# EAGLE board MLT22V1.91 (EAGLE 7.2.0)
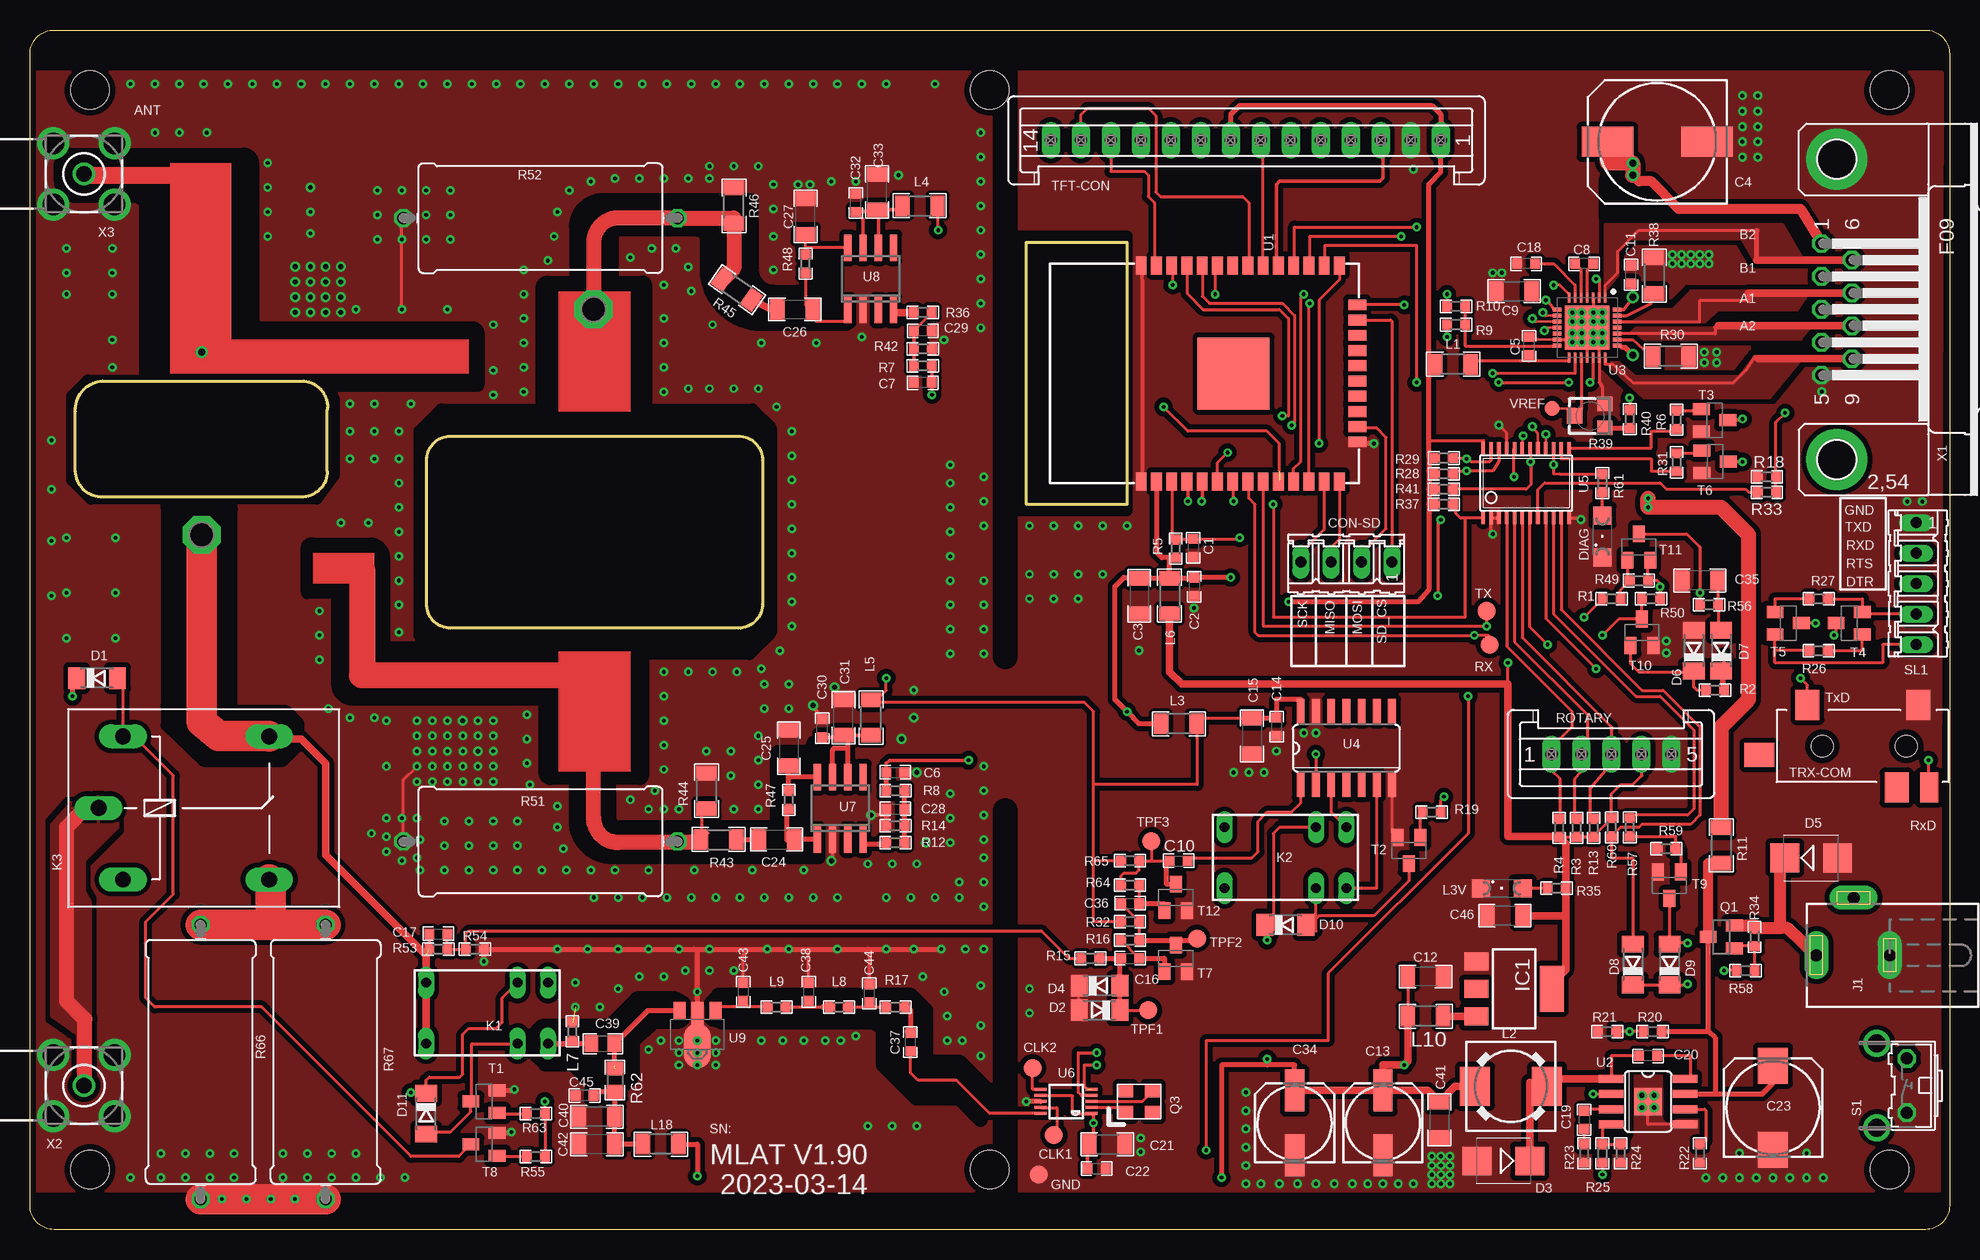
[diagram p0: board, top side]
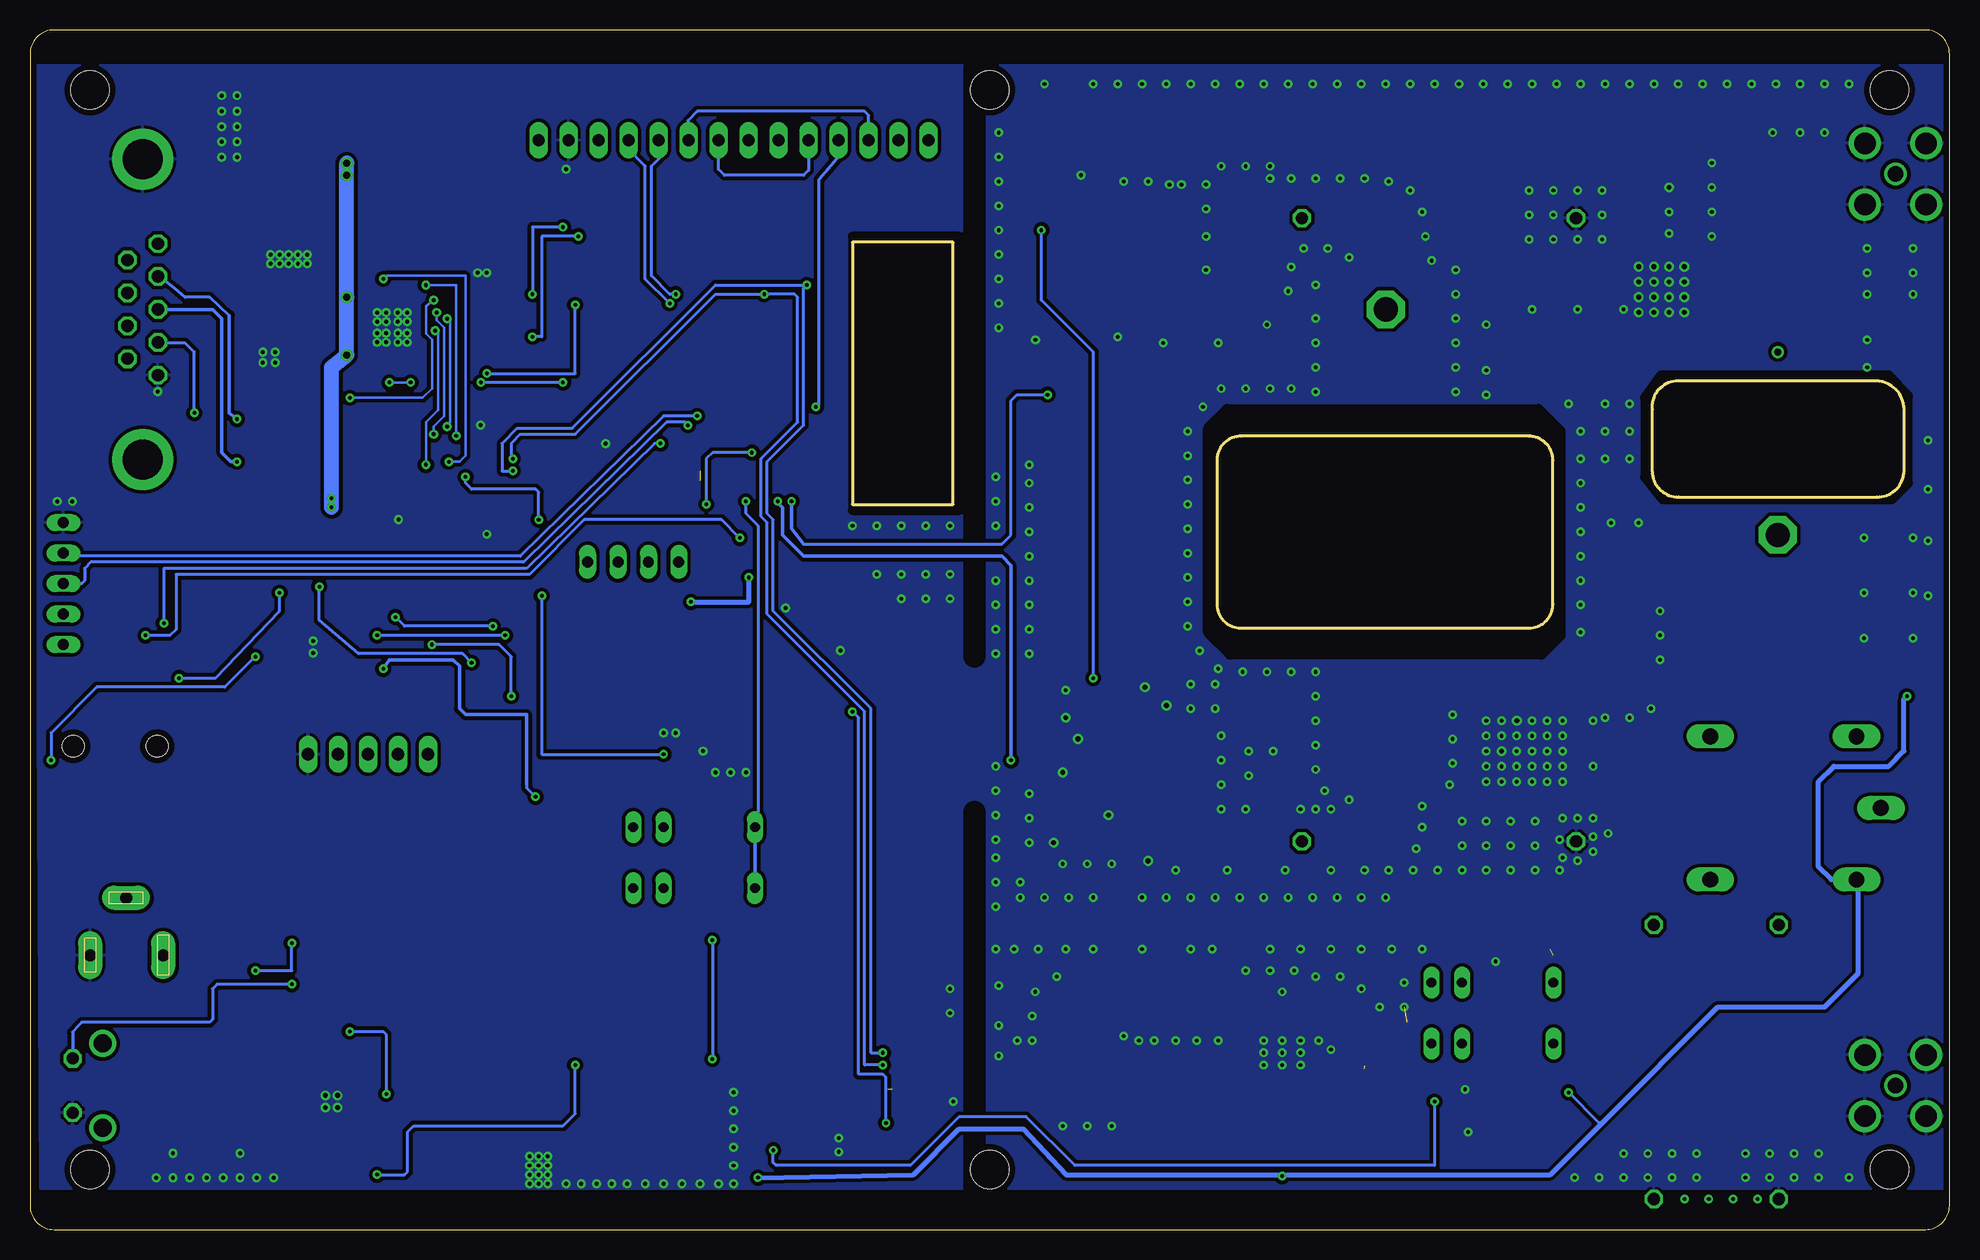
[diagram p1: board, bottom side, seen from below]

Size 160 x 100 mm. Coordinates in mm from the lower left corner, seen from the top.
Outline: 2,100 158,100 arc-90 160,98 160,2 arc-90 158,0 2,0 arc-90 0,2 0,98 arc-90 2,100
Copper layers (1*16): Top 0.035mm / dielectric 1.5mm / Bottom 0.035mm
Design rules "default *": minimum track width 8mil, minimum drill 10mil, track to track 5mil, track to pad 5mil, pad to pad 5mil, via to via 5mil, smd to smd 1mil, copper to edge 20mil, drill to drill 8mil, minimum pad ring 10mil, minimum via ring 8mil, stop-mask expansion 1mil, vias tented up to drill 25mil, thermal gap 10mil
Holes 3.2 mm at 5,5 155,5 155,95 5,95 80,5 80,95
tRestrict: 138 lines
bRestrict: 18 lines
Milling: 20 lines

## Footprints (pad centres in the part's own frame; a part is rotated, then mirrored left to right if it is on the bottom)
C0603 = smd 0.808 x 0.864: 1 -0.754,0; 2 0.754,0
C1206 = smd 1.206 x 1.702: 1 -1.478,0; 2 1.478,0
150CLZ-1010 = smd 4.3 x 2.5: + 4.15,0; - -4.15,0
153CLV-0605 = smd 3.5 x 1.6: + 2.7,0; - -2.7,0
175TMP-0808 = smd 3 x 2.5: + 3.5,0; - -3.5,0
C0805 = smd 1.133 x 1.377: 1 -0.965,0; 2 0.965,0
TP15R = smd 1.5 x 1.5: TP 0,0
04P = drill 0.914 long: 1 -3.81,0; 2 -1.27,0; 3 1.27,0; 4 3.81,0
SOD80C = smd 1.4 x 1.8: A 1.7,0; C -1.7,0
SMB = smd 2.4 x 2.4: A 2.2,0; C -2.2,0
SML1206 = smd 1.5 x 1.5: A 1.75,0; C -1.75,0
P1-20 = drill 2.007 pad 3.15 octagon: TP 0,0
SOT223 = smd 1.5 x 2: 1 -2.3,-3.15; 2 0,-3.15; 3 2.3,-3.15 | smd 3.8 x 2: 4 0,3.15
DCJ0303 = drill 1 pad 2 long: 1 0,3.1; 2 4.8,0; 3 0,-3
G5V1 = drill 0.813 long: 1 -5.08,-2.54; 2 -2.54,-2.54; 5 5.08,-2.54; 6 5.08,2.54; 9 -2.54,2.54; 10 -5.08,2.54
G5LE = drill 1.321 long: 1 -7.493,-5.969; 2 -7.493,5.969; O 4.699,5.969; P -9.525,0; S 4.699,-5.969
R1206 = smd 1.206 x 1.702: 1 -1.478,0; 2 1.478,0
DR74 = smd 2.5 x 3.25: 1 -3,0; 2 3,0
R0603 = smd 0.808 x 0.864: 1 -0.754,0; 2 0.754,0
SOT23 = smd 1 x 1.4: 1 -0.95,-1.1; 2 0.95,-1.1; 3 0,1.1
SMD3225 = smd 1.3 x 1.1: 1 -1.15,-0.9; 2 1.15,-0.9; 3 1.15,0.9; 4 -1.15,0.9
RTRIM3103 = smd 1.2 x 1.25: 1 -1,-1.225; 3 1,-1.225 | smd 1.3 x 1.3: 2 0,1.3
0922/22 = drill 1.016 octagon: 1 -11.43,0; 2 11.43,0
R0805 = smd 1.133 x 1.377: 1 -0.965,0; 2 0.965,0
S05P = drill 1.016 long: 1 5,0; 2 2.5,0; 3 0,0; 4 -2.5,0; 5 -5,0
B3F-31XX = drill 1.016 octagon: 1 -2.261,-1.245; 2 2.261,-1.245 | drill 1.499 pad 2.159: 3 -3.505,1.245; 4 3.505,1.245
05P = drill 0.914 long: 1 -5.08,0; 2 -2.54,0; 3 0,0; 4 2.54,0; 5 5.08,0
SOT23-BEC = smd 1 x 1.4: B -0.95,-1.1; C 0,1.1; E 0.95,-1.1
S14P = drill 1.016 long: 1 16.25,0; 2 13.75,0; 3 11.25,0; 4 8.75,0; 5 6.25,0; 6 3.75,0; 7 1.25,0; 8 -1.25,0; 9 -3.75,0; 10 -6.25,0; 11 -8.75,0; 12 -11.25,0; 13 -13.75,0; 14 -16.25,0
ST-3509 = smd 2 x 2.5: A 4.75,3.45; B 2.95,-3.45; C -4.5,3.45 | smd 2.5 x 2: D -8.5,-0.75 | smd 1.5 x 2.5: F 5.65,-3.45 | hole 1.8: 3.75,0; -3.25,0
ESP-WROOM-32 = smd 0.9 x 1.5: 1 7.7,9; 2 6.43,9; 3 5.16,9; 4 3.89,9; 5 2.62,9; 6 1.35,9; 7 0.08,9; 8 -1.19,9; 9 -2.46,9; 10 -3.73,9; 11 -5,9; 12 -6.27,9; 13 -7.54,9; 14 -8.81,9; 25 -8.81,-9; 26 -7.54,-9; 27 -6.27,-9; 28 -5,-9; 29 -3.73,-9; 30 -2.46,-9; 31 -1.19,-9; 32 0.08,-9; 33 1.35,-9; 34 2.62,-9; 35 3.89,-9; 36 5.16,-9; 37 6.43,-9; 38 7.7,-9 | smd 1.5 x 0.9: 15 -10.3,5.715; 16 -10.3,4.445; 17 -10.3,3.175; 18 -10.3,1.905; 19 -10.3,0.635; 20 -10.3,-0.635; 21 -10.3,-1.905; 22 -10.3,-3.175; 23 -10.3,-4.445; 24 -10.3,-5.715 | smd 6 x 6: GND 0,0
SO-8P = smd 0.66 x 2.032: 1 -1.905,-3.073; 2 -0.635,-3.073; 3 0.635,-3.073; 4 1.905,-3.073; 5 1.905,3.073; 6 0.635,3.073; 7 -0.635,3.073; 8 -1.905,3.073 | smd 2.28 x 2.28: EXP 0,0
QFN28 = smd 0.8 x 0.3: 1 -2.5,1.5; 2 -2.5,1; 3 -2.5,0.5; 4 -2.5,0; 5 -2.5,-0.5; 6 -2.5,-1; 7 -2.5,-1.5; 15 2.5,-1.5; 16 2.5,-1; 17 2.5,-0.5; 18 2.5,0; 19 2.5,0.5; 20 2.5,1; 21 2.5,1.5 | smd 0.3 x 0.8: 8 -1.5,-2.5; 9 -1,-2.5; 10 -0.5,-2.5; 11 0,-2.5; 12 0.5,-2.5; 13 1,-2.5; 14 1.5,-2.5; 22 1.5,2.5; 23 1,2.5; 24 0.5,2.5; 25 0,2.5; 26 -0.5,2.5; 27 -1,2.5; 28 -1.5,2.5 | smd 3.7 x 3.7: M 0,0
SO14 = smd 0.66 x 2.032: 1 -3.81,-3.073; 2 -2.54,-3.073; 3 -1.27,-3.073; 4 0,-3.073; 5 1.27,-3.073; 6 2.54,-3.073; 7 3.81,-3.073; 8 3.81,3.073; 9 2.54,3.073; 10 1.27,3.073; 11 0,3.073; 12 -1.27,3.073; 13 -2.54,3.073; 14 -3.81,3.073
TSSOP24 = smd 0.305 x 0.991: 1 -3.575,-2.918; 2 -2.925,-2.918; 3 -2.275,-2.918; 4 -1.625,-2.918; 5 -0.975,-2.918; 6 -0.325,-2.918; 7 0.325,-2.918; 8 0.975,-2.918; 9 1.625,-2.918; 10 2.275,-2.918; 11 2.925,-2.918; 12 3.575,-2.918; 13 3.575,2.918; 14 2.925,2.918; 15 2.275,2.918; 16 1.625,2.918; 17 0.975,2.918; 18 0.325,2.918; 19 -0.325,2.918; 20 -0.975,2.918; 21 -1.625,2.918; 22 -2.275,2.918; 23 -2.925,2.918; 24 -3.575,2.918
MSOP10 = smd 0.25 x 1: 1 -1,-2.113; 2 -0.5,-2.113; 3 0,-2.113; 4 0.5,-2.113; 5 1,-2.113; 6 1,2.113; 7 0.5,2.113; 8 0,2.113; 9 -0.5,2.113; 10 -1,2.113
SO08 = smd 0.6 x 2.2: 1 -1.905,-2.6; 2 -0.635,-2.6; 3 0.635,-2.6; 4 1.905,-2.6; 5 1.905,2.6; 6 0.635,2.6; 7 -0.635,2.6; 8 -1.905,2.6
SOT89 = smd 1 x 1.5: 1 -1.499,-1.981; 3 1.499,-1.981 | smd 1 x 2: 2 0,-1.727 | smd 2.2 x 3.7: 2@1 0,0.94
B1,27 = smd 1.27 x 1.27: TP 0,0
F09HP = drill 1.016 octagon: 1 -5.486,-1.27; 2 -2.743,-1.27; 3 0,-1.27; 4 2.743,-1.27; 5 5.486,-1.27; 6 -4.115,1.27; 7 -1.372,1.27; 8 1.372,1.27; 9 4.115,1.27 | drill 3.302 pad 5.08: G1 -12.522,0; G2 12.522,0
BU-SMA-H = drill 1.27: 1 0,0 | drill 1.778: 2 -2.55,2.55; 3 2.55,2.55; 4 2.55,-2.55; 5 -2.55,-2.55

## Placement (x,y rotation side)
C1  0.1uF  [C0603]  96.95,56.82 270 top
C2  0.1uF  [C0603]  97.03,53.59 270 top
C3  10uF  [C1206]  92.46,52.83 270 top
C4  100uF/35V  [150CLZ-1010]  135.64,90.68 180 top
C5  0.1uF  [C0603]  124.97,73.66 90 top
C6  10nF  [C0603]  72.14,38.1 0 top
C7  10nF  [C0603]  74.42,70.61 180 top
C8  22nF  [C0603]  129.54,80.52 180 top
C9  4.7uF  [C1206]  123.7,78.23 0 top
C10  470nF  [C0603]  95.76,30.73 0 top
C11  0.1uF  [C0603]  133.45,79.6 90 top
C12  10uF  [C1206]  116.33,21.08 180 top
C13  470uF/16V  [153CLV-0605]  112.78,8.89 90 top
C14  10nF  [C0603]  103.89,41.91 270 top
C15  10uF  [C1206]  101.85,41.15 270 top
C16  470nF  [C0603]  91.69,22.61 0 top
C17  6.8pF  [C0603]  34.04,24.64 0 top
C18  0.1uF  [C0603]  124.71,80.52 180 top
C19  220pF  [C0603]  129.54,9.14 270 top
C20  0.1uF  [C0603]  134.87,14.48 180 top
C21  10uF  [C1206]  89.79,7.11 0 top
C22  0.1uF  [C0603]  88.9,5.08 0 top
C23  470uF/35V  [175TMP-0808]  145.29,10.16 90 top
C24  10uF  [C1206]  62.23,32.51 0 top
C25  10uF  [C1206]  63.25,40.13 270 top
C26  10uF  [C1206]  63.75,76.71 0 top
C27  10uF  [C1206]  64.64,84.45 90 top
C28  1uF  [C0603]  72.14,35.05 0 top
C29  1uF  [C0603]  74.42,74.93 180 top
C30  0.01uF  [C0603]  66.04,41.78 90 top
C31  10uF  [C1206]  67.82,42.67 90 top
C32  0.01uF  [C0603]  68.83,85.6 90 top
C33  10uF  [C1206]  70.61,86.49 90 top
C34  470uF/16V  [153CLV-0605]  105.41,8.89 90 top
C35  10uF  [C1206]  139.19,54.1 180 top
C36  470nF  [C0603]  91.69,27.18 0 top
C37  470pF  [C0603]  73.41,15.62 90 top
C38  4.7pF  [C0603]  64.9,19.81 270 top
C39  470pF  [C0805]  47.75,15.49 0 top
C40  10uF  [C1206]  47.24,9.4 180 top
C41  10uF  [C1206]  117.47,9.14 270 top
C42  10uF  [C1206]  47.24,7.11 180 top
C43  4.7pF  [C0603]  59.44,19.81 270 top
C44  47pF  [C0603]  69.98,19.68 90 top
C45  470pF  [C0603]  46.23,11.18 180 top
C46  10uF  [C1206]  122.94,26.16 180 top
CLK1  TPTP15R  [TP15R]  85.34,7.87 0 top
CLK2  TPTP15R  [TP15R]  83.57,13.46 0 top
CON-SD  [04P]  109.73,55.65 180 top
D1  1N4148  [SOD80C]  5.59,45.97 0 top
D2  1N4148  [SOD80C]  89.15,18.29 180 top
D3  SS34  [SMB]  122.81,5.71 180 top
D4  1N4148  [SOD80C]  89.15,20.32 0 top
D5  SMBJ24A  [SMB]  148.46,30.99 0 top
D6  1N4148  [SOD80C]  138.68,48.26 90 top
D7  1N4148  [SOD80C]  140.97,48.26 90 top
D8  1N4148  [SOD80C]  133.6,22.1 90 top
D9  1N4148  [SOD80C]  136.65,22.1 90 top
D10  1N4148  [SOD80C]  104.65,25.4 0 top
D11  1N4148  [SOD80C]  33.02,9.65 270 top
DIAG  DNP  [SML1206]  131.06,57.78 90 top
FWD  TPPAD1-20  [P1-20]  46.99,76.71 0 top
GND  TPTP15R  [TP15R]  84.07,4.57 0 top
IC1  LD117AS33TR  [SOT223]  123.7,20.07 270 top
J1  [DCJ0303]  152,22.86 90 top
K1  G5V1  [G5V1]  38.1,18.03 180 top
K2  G5V1  [G5V1]  104.65,31 180 top
K3  G5LE  [G5LE]  15.24,35.14 0 top
L1  FB  [R1206]  118.62,72.14 0 top
L2  10uH  [DR74]  123.44,11.94 180 top
L3  FB  [R1206]  95.76,42.16 0 top
L3V  [SML1206]  122.68,28.45 0 top
L4  FB  [R1206]  74.17,85.34 180 top
L5  FB  [R1206]  70.1,42.67 270 top
L6  FB  [R1206]  95,52.83 90 top
L7  180  [R0603]  45.21,16.51 270 top
L8  100  [R0603]  67.44,18.54 180 top
L9  100  [R0603]  62.23,18.54 180 top
L10  FB  [R1206]  116.33,17.78 0 top
L18  0  [R1206]  52.58,7.11 0 top
Q1  AO3401  [SOT23]  140.97,24.38 90 top
Q3  25Mhz  [SMD3225]  92.46,10.67 0 top
R1  4.7K  [R0603]  131.83,52.58 180 top
R2  4.7K  [R0603]  140.46,44.96 180 top
R3  10K  [R0603]  128.91,33.48 90 top
R4  10K  [R0603]  127.46,33.48 90 top
R5  10K  [R0603]  95.5,56.77 270 top
R6  2K  [R0603]  137.26,67.51 90 top
R7  1K  [R0603]  74.42,72.01 180 top
R8  1K  [R0603]  72.14,36.58 0 top
R9  0  [R0603]  118.87,75.44 0 top
R10  1K  [R0603]  118.87,76.96 0 top
R11  FUSE(2A)  [R1206]  140.97,32 90 top
R12  1K  [R0603]  72.14,32.26 180 top
R13  10K  [R0603]  130.35,33.48 90 top
R14  47K  [R0603]  72.14,33.66 0 top
R15  1K  [R0603]  88.39,22.61 180 top
R16  470K  [R0603]  91.69,24.13 0 top
R17  1K  [R0603]  72.14,18.54 180 top
R18  10K  [R0603]  144.78,62.74 0 top
R19  2K  [R0603]  116.84,34.8 180 top
R20  100K  [R0603]  135.25,16.51 0 top
R21  20K  [R0603]  131.47,16.51 0 top
R22  210K  [R0603]  139.19,6.35 90 top
R23  68.1K  [R0603]  129.54,6.35 90 top
R24  40.2K  [R0603]  132.59,6.35 90 top
R25  210K  [R0603]  131.06,6.35 270 top
R26  10K  [R0603]  149.1,48.26 0 top
R27  10K  [R0603]  149.1,52.58 180 top
R28  10K  [R0603]  117.86,62.99 0 top
R29  10K  [R0603]  117.86,64.31 0 top
R30  0R11  [R1206]  136.75,72.8 0 top
R31  2K  [R0603]  137.26,63.96 90 top
R32  1K  [R0603]  91.69,25.65 180 top
R33  10K  [R0603]  144.78,61.47 180 top
R34  10K  [R0603]  143.76,24.38 90 top
R35  2K  [R0603]  127.25,28.45 0 top
R36  1K  [R0603]  74.42,76.45 180 top
R37  10K  [R0603]  117.86,60.45 0 top
R38  0R11  [R1206]  135.38,79.5 90 top
R39  10K  [RTRIM3103]  130.05,67.82 90 top
R40  10K  [R0603]  133.35,67.56 90 top
R41  10K  [R0603]  117.86,61.72 180 top
R42  47K  [R0603]  74.42,73.41 180 top
R43  470  [R1206]  57.4,32.51 180 top
R44  1K8  [R1206]  56.39,36.58 90 top
R45  470  [R1206]  58.93,78.36 325 top
R46  1K8  [R1206]  58.67,85.34 270 top
R47  180  [R0603]  63.25,35.81 270 top
R48  180  [R0603]  64.64,80.52 270 top
R49  4.7K  [R0603]  134.11,54.1 180 top
R50  1.5K  [R0603]  135.13,52.58 180 top
R51  56  [0922/22]  42.55,32.35 0 top
R52  56  [0922/22]  42.55,84.32 0 top
R53  47K  [R0603]  34.04,23.37 180 top
R54  DNP  [R0603]  37.08,23.37 180 top
R55  2K  [R0603]  42.16,6.1 180 top
R56  1.5K  [R0603]  139.95,52.07 0 top
R57  10K  [R0603]  133.35,33.53 90 top
R58  10K  [R0603]  143,21.59 0 top
R59  4.7K  [R0603]  136.4,31.75 180 top
R60  10K  [R0603]  131.83,33.53 270 top
R61  DNP  [R0603]  131.06,62.23 90 top
R62  4.7uH  [R0805]  48.77,12.45 270 top
R63  2K  [R0603]  42.16,9.65 180 top
R64  470K  [R0603]  91.69,28.7 180 top
R65  1K  [R0603]  91.69,30.73 180 top
R66  100  [0922/22]  14.22,13.97 270 top
R67  100  [0922/22]  24.64,13.97 270 top
ROTARY  [S05P]  131.83,39.62 180 top
RX  TPTP15R  [TP15R]  121.67,48.77 0 top
S1  [B3F-31XX]  155.19,12 90 top
SL1  [05P]  157.23,53.85 270 top
T1  SS8050  [SOT23-BEC]  37.85,10.67 90 top
T2  SS8050  [SOT23-BEC]  114.94,31.6 180 top
T3  SS8050  [SOT23-BEC]  140.41,67.46 270 top
T4  SS8050  [SOT23-BEC]  151.64,50.55 90 top
T5  SS8050  [SOT23-BEC]  146.56,50.55 270 top
T6  SS8050  [SOT23-BEC]  140.46,64.01 270 top
T7  [SOT23-BEC]  95.5,22.61 0 top
T8  SS8050  [SOT23-BEC]  37.85,7.11 90 top
T9  SS8050  [SOT23-BEC]  136.65,28.7 180 top
T10  SS8050  [SOT23-BEC]  134.37,49.78 0 top
T11  SS8550  [SOT23-BEC]  134.11,56.9 0 top
T12  [SOT23-BEC]  95.5,27.69 0 top
TFT-CON  [S14P]  101.35,90.81 0 top
TPF1  TPTP15R  [TP15R]  93.22,18.29 0 top
TPF2  TPTP15R  [TP15R]  97.28,24.26 0 top
TPF3  TPTP15R  [TP15R]  93.47,32.38 0 top
TRX  TPPAD1-20  [P1-20]  14.31,57.91 90 top
TRX-COM  ST-3509  [ST-3509]  152.65,40.3 0 top
TX  TPTP15R  [TP15R]  121.41,51.56 0 top
U1  ESP-WROOM-32  [ESP-WROOM-32]  100.33,71.37 180 top
U2  MP1584  [SO-8P]  134.87,10.67 270 top
U3  TMC2209-LA  [QFN28]  129.79,75.18 270 top
U4  74HCT393D  [SO14]  109.73,40.13 0 top
U5  PCA9555PW  [TSSOP24]  124.71,62.23 0 top
U6  SI5351AU  [MSOP10]  86.36,10.67 90 top
U7  AD8307  [SO08]  67.53,35.11 0 top
U8  AD8307  [SO08]  70.07,79.25 0 top
U9  BT05CV  [SOT89]  55.63,16.26 180 top
VREF  TPB1,27  [B1,27]  126.87,68.45 0 top
X1  [F09HP]  150.6,76.71 270 top
X2  BU-SMA-H  [BU-SMA-H]  4.5,12 180 top
X3  BU-SMA-H  [BU-SMA-H]  4.5,88 180 top

## Library data of the parts
C1-C46 L1 L3-L10 L18 R1-R67 = rcl
CLK1 CLK2 FWD GND RX TPF1-TPF3 TRX TX VREF = testpad
CON-SD SL1 = con-amp-quick; OC_FARNELL: unknown; OC_NEWARK: unknown
D1-D11 = diode
DIAG L3V = led
IC1 = v-reg
J1 = con-jack; OC_FARNELL: unknown; OC_NEWARK: unknown
K1 K2 = relay; MPN: G5V-1-DC24; OC_FARNELL: 9949593; OC_NEWARK: 36M6377
K3 = relay; OC_FARNELL: unknown; OC_NEWARK: unknown
L2 = inductors
Q1 = transistor-small-signal
Q3 U6 U9 = Si5351
ROTARY TFT-CON = con-amp-mt; OC_FARNELL: unknown; OC_NEWARK: unknown
S1 = switch-omron; MPN: B3F-3100; OC_FARNELL: 959704; OC_NEWARK: 36M3582
T1-T3 T6 T8 T9 = transistor-neu-to92
T4 T5 T7 T10-T12 = transistor
TRX-COM U7 U8 = _RoweTel
U1 = esp32
U2 = PAM2421
U3 = MotorDriver
U4 = 74xx-eu
U5 = micro-philips; MPN: PCA9555PW; OC_FARNELL: 1408297; OC_NEWARK: 63K6069
X1 = con-subd; OC_FARNELL: unknown; OC_NEWARK: unknown
X2 X3 = con-coax; OC_FARNELL: unknown; OC_NEWARK: unknown

## Nets
3V3: C2.1 C3.1 C21.1 C22.1 L1.1 L3.1 L6.2 R5.2 R28.1 R29.1 R37.1 R41.2 TFT-CON.1 TFT-CON.8 U1.2 U5.24 U6.1 U6.7
3V3_F: C14.1 C15.1 L3.2 L4.1 L5.1 R32.2 R65.2 U4.14
5VOUT: C9.2 R40.2 U3.8
+3V3: C46.1 IC1.4 L6.1 R3.1 R4.1 R13.1 R35.2 R49.1 R50.1 R60.1 ROTARY.4 T11.E
+5V: C12.2 C13.+ C34.+ C41.1 D1.C D10.C D11.C K1.2 K2.2 K3.1 L2.2 L10.1 L18.2 R25.2
+12V1: C4.+ C11.1 R11.2 U3.22 U3.28 X1.1
ADC_FWD: C7.1 R7.1 U1.4
ADC_REV: C6.1 R8.1 U1.5
ANT: X3.1
ANT_SEL0: R6.1 U5.13
ANT_SEL1: R31.1 U5.14
ANT_SW0: T3.C X1.2
ANT_SW1: T6.C X1.3
BRA: R30.1 U3.23
BRB: R38.1 U3.27
CLK0: C37.1 U6.10
CLK1: CLK1.TP U6.9
CLK2: CLK2.TP U6.6
COUNTER_IN: K2.5 K2.6 U1.7
CPI: C8.2 U3.5
CPO: C8.1 U3.4
DCDC_BST2: C20.1 U2.8
DCDC_COMP2: C19.1 U2.3
DCDC_EN2: R20.1 R21.2 U2.2
DCDC_FB2: R24.2 R25.1 U2.4
DCDC_SW2: C20.2 D3.C L2.1 U2.1
DET: R33.2 U5.8
DTR: R26.1 SL1.5 T5.E
EN: C1.1 R5.1 T4.C U1.3
ENC_SW1: R3.2 ROTARY.2 U5.5
ENC_SW2: R4.2 ROTARY.1 U5.4
FC_CLR: U4.2 U5.20
FREQ_BY_16: K2.10 U4.6
FREQ_MEAS: C17.2 R15.2 R53.1 R54.2
FREQIN0: C36.1 R16.2 R32.1 T7.C TPF2.TP
FREQIN1: C10.1 R64.2 R65.1 T12.C TPF3.TP
FWD0: C29.2 R7.2 R36.1 R42.2
GND: C1.2 C2.2 C3.2 C4.- C5.2 C6.2 C7.2 C9.1 C11.2 C12.1 C13.- C14.2 C15.2 C18.2 C21.2 C22.2 C23.- C25.1 C27.2 C28.1 C29.1 C30.2 C31.2 C32.2 C33.2 C34.- C35.2 C38.1 C40.2 C41.2 C42.2 C43.1 C44.2 C45.2 C46.2 D2.A D3.A D4.C D5.A D6.A DIAG.C GND.TP IC1.1 J1.3 L3V.C L7.1 R14.1 R18.1 R21.1 R22.1 R23.1 R24.1 R30.2 R38.2 R39.3 R42.1 R44.2 R46.1 R51.1 R52.1 R54.1 R59.2 R66.2 R67.2 ROTARY.5 S1.1 SL1.1 T1.E T2.E T3.E T6.E T7.E T8.E T9.E T10.E T12.E TFT-CON.2 TRX-COM.A U1.1 U1.15 U1.38 U2.5 U2.EXP U3.3 U3.13 U3.18 U3.20 U3.M U4.7 U4.13 U5.2 U5.3 U5.12 U5.21 U6.8 U7.2 U8.2 U9.2 U9.2@1 X1.5 X1.G1 X2.2 X2.3 X2.4 X2.5 X3.2 X3.3 X3.4 X3.5
IO0: T5.C U1.25
MOT_DIAG: R61.2 U3.11 U5.15
MOT_DIR: U1.26 U3.19
MOT_DRV_PWR: C5.1 L1.2 U3.15
MOT_EN: R41.1 U3.2 U5.18
MOT_INDEX: U3.12
MOT_STEP: U1.24 U3.16
MS1: U3.9 U5.16
MS2: U3.10 U5.17
N$1: C10.2 U4.1
N$2: L3V.A R35.1
N$3: D5.C J1.1 Q1.2 R34.2
N$4: C24.2 R47.2 U7.1
N$5: R56.1 T11.C TRX-COM.C
N$6: K2.1 U4.3
N$7: C25.2 R47.1 U7.8
N$8: C24.1 R43.1
N$9: U4.5
N$10: R6.2 T3.B
N$11: C30.1 C31.1 L5.2 U7.6 U7.7
N$12: R13.2 ROTARY.3 U5.6
N$13: R12.2 U7.4
N$14: R55.2 T8.B
N$15: C32.1 C33.1 L4.2 U8.6 U8.7
N$16: C16.1 D2.C D4.A R15.1 TPF1.TP
N$17: C19.2 R23.2
N$18: D1.A K3.2 T8.C
N$19: K3.S R66.1 R67.1
N$20: C27.1 R48.1 U8.8
N$21: D10.A K2.9 T2.C
N$22: C26.2 R48.2 U8.1
N$23: C26.1 R45.2
N$24: R19.2 T2.B
N$25: R36.2 U8.4
N$26: IC1.3 L10.2
N$27: Q3.1 U6.2
N$28: R1.1 R49.2 T11.B
N$29: R22.2 U2.6
N$30: D6.C R2.2 T10.B
N$31: R26.2 T4.B
N$32: Q3.3 U6.3
N$33: C38.2 L8.2 L9.1
N$34: R27.2 T5.B
N$35: R31.2 T6.B
N$36: C16.2 R16.1 T7.B
N$37: C43.2 L9.2 U9.1
N$38: C35.1 D7.A R56.2
N$39: D7.C R2.1 TRX-COM.F
N$40: DIAG.A R61.1
N$41: R39.1 R40.1
N$42: Q1.1 R34.1 R58.2
N$43: R57.1 R59.1 T9.B
N$44: C39.2 R62.1 U9.3
N$45: D8.C D9.C S1.2
N$46: D11.A K1.9 T1.C
N$47: R63.2 T1.B
N$48: C37.2 R17.1
N$49: C36.2 R64.1 T12.B
N$50: C44.1 L8.1 R17.2
N$51: R18.2 R33.1 X1.4
N$55: C23.+ Q1.3 R11.1 R20.2 U2.7
OA1: U3.24 X1.8
OA2: U3.21 X1.9
OB1: U3.26 X1.7
OB2: U3.1 X1.6
OFF_DET: D8.A R60.2 U5.11
ONOFF: D9.A R58.1 T9.C
PA3V: C40.1 C42.1 C45.1 L18.1 R62.2
PCA_INT: R37.2 U1.6 U5.1
PD/UART: R9.2 R10.2 U3.14
PWR_FWD: FWD.TP R45.1 R46.2 R52.2
PWR_ON: R57.2 U5.10
PWR_REV: R43.2 R44.1 R51.2
RELAY1: R19.1 U5.9
REV0: C28.2 R8.2 R12.1 R14.2
RTS: R27.1 SL1.4 T4.E
RXD0: SL1.3 U1.34
SCL: R28.2 U1.36 U5.22 U6.4
SD_CS: CON-SD.1 U1.23
SD_MISO: CON-SD.3 U1.14
SD_MOSI: CON-SD.2 U1.16
SD_SCK: CON-SD.4 U1.13
SDA: R29.2 U1.33 U5.23 U6.5
SPREAD: U3.7 U5.19
T_CS: TFT-CON.11 U1.10
TFT_CS: TFT-CON.3 U1.29
TFT_DC: TFT-CON.5 U1.11
TFT_MISO: TFT-CON.13 U1.31
TFT_MOSI: TFT-CON.6 TFT-CON.12 U1.37
TFT_RES: TFT-CON.4 U1.12
TFT_SCLK: TFT-CON.7 TFT-CON.10 U1.30
TRX: C17.1 K1.5 K1.6 K3.O R53.2 TRX.TP
TRX_IN: K3.P X2.1
TXD0: SL1.2 U1.35
U2RXD: R9.1 U1.27
U2TXD: R10.1 U1.28
UART1_RX: R50.2 RX.TP T10.C U1.8
UART1_TX: R1.2 TX.TP U1.9
VCP: C18.1 U3.6
VFO_IN: C39.1 K1.10 L7.2
VFO_SEL: R55.1 R63.1 U5.7
VREF: R39.2 U3.17 VREF.TP

## Tracks (layer width: path | path; a pad name or v marks a point on that pad's centre or on a via)
3V3  (via drill 0.3)
  Top 0.254: 88.13,7.08 C21.1 | 88.14,6.35 88.14,6.6 | U6.7 86.88,11.17 86.87,10.92 86.87,9.65 88.46,9.65 | 88.46,9.65 U6.1 88.42,9.67 88.65,9.42 88.65,9.65 88.46,9.65 | 117.6,90.94 TFT-CON.1 | 116.59,63.25 116.64,63.04 116.69,62.99 R28.1 | R29.1 116.64,64.31 116.59,64.52 | R37.1 116.59,60.45 | 116.59,65.79 121.16,65.79 121.16,65.17 U5.24 | R41.2 116.59,61.72 | L1.1 116.59,72.14
  Top 0.305: C22.1 88.14,6.6 88.13,7.08 | C21.1 88.65,7.11 v88.65,8.89 88.65,9.42 | C2.1 | 117.6,90.93 TFT-CON.1
  Top 0.406: 97.19,54.25 C2.1 | R5.2 95,56.02 | 95,56.02 94.35,56.02 93.9,56.47 U1.2 | v104.9,52.32 115.7,52.32 116.59,53.34 116.59,60.45 116.59,61.72 116.59,63.25 116.59,64.52 116.59,65.79 116.59,72.14 116.59,87.12 117.6,88.14 117.6,90.93 | v100.08,54.36 C2.1 | L3.1 92.46,42.16 v91.44,43.18 90.42,44.2 90.42,53.59 91.19,54.36 92.69,54.36 | C3.1 L6.2 | L6.2 96.99,54.31 | L6.2 95,56.02 | TFT-CON.8 100.1,92.98 100.84,93.73 116.84,93.73 117.6,92.96 117.6,90.94
  Top 0.61: 92.69,54.36 C3.1 | 96.99,54.31 C2.1
  Bottom 0.254: v88.65,8.89 88.65,12.7 88.9,12.95 90.93,12.95 90.93,42.67 v91.44,43.18 | 117.6,90.94 TFT-CON.1
  Bottom 0.406: v104.9,52.32 100.08,52.32 v100.08,54.36
3V3_F  (via drill 0.3)
  Top 0.254: 70.31,44.15 L5.1 70.31,43.94 87.88,43.94 88.65,43.18 88.65,37.08 | R32.2 88.65,25.65 88.65,30.73 | R65.2 88.65,30.73 | 88.65,30.73 88.65,37.08 | L3.2 97.28,42.12 97.28,37.08 88.65,37.08 | 70.36,44.2 70.61,44.2 71.37,44.96 v71.37,45.97 | v75.69,83.31 75.69,85.3 L4.1 | 97.7,42.63 C15.1
  Top 0.406: 97.7,42.63 L3.2 97.49,41.91 | C15.1 103.89,42.63 C14.1 103.89,44.2 105.92,44.2 U4.14
  Top 0.61: L5.1 70.36,44.2
  Bottom 0.254: v71.37,45.97 71.37,73.15 75.69,77.47 v75.69,83.31
5VOUT  (via drill 0.3, 0.33)
  Top 0.254: C9.2 125.18,77.64 125.35,77.47 v126.36,77.47 126.49,77.47 127,76.71 | v133.35,69.34 R40.2
  Top 0.305: U3.8 127.02,76.68 127,76.71
  Bottom 0.203: v126.36,77.47 127,76.96 127,74.68 126.49,74.17 126.49,70.1 127.25,69.34 v133.35,69.34
+3V3  (via drill 0.3)
  Top 0.254: 128.03,32.66 R4.1 129.74,32.73 R3.1 R13.1 130.35,32.81 131.06,33.53 131.07,33.53 R60.1 131.83,36.32 132.59,37.08 133.6,37.08 134.37,37.85 134.37,39.58 ROTARY.4 | T11.E 134.87,55.6 R49.1 135.64,54.1 135.88,53.86 R50.1 v135.89,53.59 | 123.19,45.47 v123.19,47.24
  Top 0.61: IC1.4 126.85,20.47 128.01,21.63 128.01,26.42 | 128.01,26.42 R35.2 128.01,32.17 R4.1 127.42,32.77 123.19,32.77 123.19,45.47 96.01,45.47 95,46.48 L6.1 | C46.1 127.75,26.16 128.01,26.42
  Bottom 0.254: v123.19,47.24 123.95,48.01 132.59,48.01 135.89,50.8 v135.89,53.59
+5V  (via drill 0.3)
  Top 0.254: R25.2 v131.06,4.57 | K2.2 104.15,33.54 103.63,33.02 103.63,24.97 D10.C 102.95,24.46 v103.12,24.13 | v103.12,14.22 103.12,13.72 | K1.2 39.37,19.3 39.37,17.27 38.86,16.76 36.58,16.76 36.07,16.26 36.07,12.95 35.81,12.7 33.27,12.7 33.02,12.45 D11.C 32.94,11.43 v31.75,11.43 | C12.2 L10.1
  Top 0.406: C34.+ 105.41,13.72 103.12,13.72 99.31,13.72 v99.31,4.32 | v3.56,44.45 3.56,45.64 D1.C | L18.2 55.63,7.11 v55.63,4.45
  Top 0.61: C34.+ C13.+ | C13.+ 116.51,11.59 C41.1 118.79,11.94 L2.2 | C13.+ 112.78,13.72 v114.55,13.72 114.85,14.02 L10.1
  Bottom 0.254: v131.06,4.57 128.78,4.57 128.52,4.83 128.52,8.13 128.02,8.64 115.57,8.64 114.55,9.65 v114.55,13.72 | v103.12,24.13 v103.12,14.22 | 28.96,8.89 29.21,8.89 v31.75,11.43
  Bottom 0.406: v99.31,4.32 86.36,4.57 82.55,8.38 77.22,8.38 73.66,4.57 55.63,4.57 | 55.63,4.57 33.27,4.57 28.96,8.89 19.3,18.54 10.41,18.54 7.62,21.34 7.62,29.04 K3.1 9.87,29.17 10.92,30.23 10.92,37.34 9.65,38.61 5.08,38.61 3.81,39.88 3.81,44.2 v3.56,44.45 | v55.63,4.45 55.63,4.57
+12V1  (via drill 0.3, 0.6)
  Top 0.305: U3.28 132.82,76.68 132.84,76.71 133.6,77.7 v133.6,77.72 133.6,78.74 C11.1 | U3.22 132.72,73.56 | v133.6,88.9 133.86,88.9
  Top 0.406: 132.72,73.56 132.94,73.56 v133.6,72.9
  Top 0.813: X1.1 149.35,82.18 147.57,85.09 137.41,85.09 135.13,87.38 134.11,87.38 v133.6,87.88
  Top 1.27: R11.2 140.97,41.91 143.26,44.2 143.26,57.91 140.97,60.2 v134.87,60.2 v134.87,60.96 | C4.+ 131.49,88.9 v133.6,88.9 v133.6,87.88
  Bottom 1.27: v134.87,60.2 134.87,71.88 v133.6,72.9 v133.6,77.72 v133.6,88.9
ADC_FWD  (via drill 0.3)
  Top 0.305: v75.18,69.6 C7.1 R7.1 | v96.52,60.71 96.52,62.29 U1.4
  Bottom 0.254: 95.5,57.15 78.99,57.15 78.23,57.91 78.23,69.09 77.72,69.6 v75.18,69.6
  Bottom 0.305: 95.5,57.15 96.52,58.42 v96.52,60.71
ADC_REV  (via drill 0.3)
  Top 0.305: U1.5 97.71,60.53 v97.66,60.71 | v78.23,39.12 71.63,39.12 71.37,38.86 C6.1
  Top 0.406: R8.1 C6.1
  Bottom 0.305: v97.66,60.71 97.66,60.58 97.28,60.2 97.28,57.91 95.5,56.13 78.99,56.13 78.23,55.37 v78.23,39.12
ANT  (via drill 0.6)
  Top 1.422: X3.1 arc90 4.62,87.88 13.21,87.88 arc-90 14.31,86.61 v14.31,73.15
ANT_SEL0
  Top 0.254: U5.13 135.13,65.15 135.13,66.55 137.26,66.55 R6.1
ANT_SEL1
  Top 0.254: U5.14 127.64,64.26 135.13,64.26 135.13,63.25 137.26,63.25 R31.1
ANT_SW0  (via drill 0.3)
  Top 0.305: T3.C 142.65,67.46 v142.75,67.56
  Bottom 0.254: 143.38,76.2 145.03,77.72 147.07,77.72 147.96,78.49 148.88,79.25 X1.2
  Bottom 0.305: v142.75,67.56 143.38,68.07 143.38,76.2
ANT_SW1  (via drill 0.3)
  Top 0.305: T6.C v142.75,64.01
  Bottom 0.305: v142.75,64.01 143.26,64.01 144.02,64.77 144.02,75.95 144.78,76.71 X1.3
BRA
  Top 0.254: U3.23 133.33,74.18 133.35,74.17 133.6,74.17 134.49,73.41 134.65,73.51 R30.1
BRB
  Top 0.254: U3.27 133.08,76.18 135.13,77.22 R38.1
CLK0
  Top 0.254: U6.10 79.99,9.67 77.22,12.45 74.04,12.45 73.41,13.08 C37.1
CLK1
  Top 0.254: U6.9 85.6,10.16 85.6,8.13 CLK1.TP
CLK2
  Top 0.254: 84.25,11.68 U6.6 84.23,11.68 83.57,11.68 CLK2.TP
COUNTER_IN  (via drill 0.3)
  Top 0.254: v100.33,60.71 100.33,62.29 U1.7
  Bottom 0.254: v100.33,60.71 100.33,59.69 99.31,58.67 99.31,34.04 99.56,33.53 K2.5
  Bottom 0.305: 99.56,33.53 99.56,28.47 K2.6
CPI
  Top 0.254: U3.5 129.29,80.01 C8.2
CPO
  Top 0.254: U3.4 129.79,80.02 C8.1
DCDC_BST2
  Top 0.254: U2.8 138.43,12.57 138.43,14.48 C20.1
DCDC_COMP2
  Top 0.254: U2.3 130.18,10.03 C19.1
DCDC_EN2  (via drill 0.3)
  Top 0.254: R21.2 v133.35,16.51 R20.1 | v130.3,11.3 U2.2
  Bottom 0.254: v133.35,16.51 130.56,16.51 130.3,16.26 v130.3,11.3
DCDC_FB2
  Top 0.254: U2.4 131.19,8.76 131.06,8.64 R25.1 R24.2
DCDC_SW2
  Top 0.254: C20.2 131.8,14.48 U2.1
  Top 0.406: U2.1 132.33,12.57
  Top 0.61: D3.C 125.01,12.28 L2.1 127.08,12.57 U2.1
DET
  Top 0.254: U5.8 125.69,61.68 126.24,62.23 135.89,62.23 136.4,61.72 143,61.72 143.26,61.47 R33.2
DTR
  Top 0.254: R26.1 145.46,48.26 | 145.46,48.26 T5.E | SL1.5 154.43,48.77 154.43,47.24 145.46,47.24 145.46,48.26
EN  (via drill 0.3)
  Top 0.254: 95.17,57.52 R5.1 | R5.1 95.5,57.57 C1.1 100.93,57.57 v100.84,57.66 | U1.3 95.17,57.85 R5.1 | T4.C 150.54,49.7 v150.37,49.53
  Bottom 0.254: v100.84,57.66 102.36,59.18 113.79,59.18 118.36,54.61 147.83,54.61 147.83,50.04 148.34,49.53 v150.37,49.53
ENC_SW1
  Top 0.254: U5.5 123.74,48.98 129.79,42.93 129.79,40.13 129.54,39.88 129.29,39.66 ROTARY.2 129.29,38.14 128.78,37.59 128.78,34.23 R3.2
ENC_SW2
  Top 0.254: U5.4 123.09,48.62 128.52,43.18 128.52,41.91 126.75,40.13 126.75,39.7 ROTARY.1 126.83,38.27 127.51,37.59 127.51,34.28 R4.2
FC_CLR  (via drill 0.3)
  Top 0.254: v117.35,52.83 117.35,59.18 v117.6,59.18 | v107.19,39.62 U4.2 | v123.7,62.74 123.7,65.11 U5.20
  Bottom 0.254: v117.35,52.83 117.35,39.62 v107.19,39.62 | v117.6,59.18 117.6,61.47 117.86,61.72 123.19,61.72 123.7,62.23 v123.7,62.74
FREQ_BY_16
  Top 0.254: K2.10 112.27,28.46 U4.6
FREQ_MEAS
  Top 0.254: C17.2 R53.1 R54.2 36.32,24.64 36.58,24.89 84.33,24.89 86.61,22.61 R15.2
FREQIN0
  Top 0.254: 92.45,24.09 R16.2 R32.1 92.45,25.67 C36.1
  Top 0.406: 92.45,24.09 95.5,24.09 T7.C 95.63,24.09 97.28,24.09 TPF2.TP
FREQIN1
  Top 0.254: C10.1 94.74,30.73 93.47,30.73 | R65.1 93.47,30.73 | R64.2 90.94,29.47 91.19,29.72 92.2,29.72 92.46,29.97 R65.1 | 92.46,30.74 R65.1 | TPF3.TP 93.47,30.73
  Top 0.406: T12.C 94.74,28.79 94.74,30.73
FWD0
  Top 0.254: R36.1 73.67,74.94 C29.2
  Top 0.305: C29.2 R42.2 R7.2
GND  (via drill 0.3, 0.33, 0.4)  (1 unrouted)
  Top 0.203: 127.29,74.17 124.97,74.17
  Top 0.254: U2.5 134.87,8.76 U2.EXP | v134.37,11.18 v135.38,11.18 v135.38,10.16 v134.37,10.16 | 129.29,74.17 127.29,74.17 U3.13 | 129.29,74.17 129.29,75.18 U3.M | U3.3 v130.29,75.68 U3.M | U3.18 129.79,73.66 129.29,74.17 | U3.M 130.79,74.18 U3.20 130.79,70.63 131.06,70.23 131.06,68.86 R39.3 | R51.1 31.12,37.47 v32.26,38.61 | v30.99,76.71 30.99,84.19 R52.1 | U5.21 123.09,66.39 v122.43,67.06 | D2.A D4.C | v22.1,2.54 21.08,3.56 v21.08,4.32 | U4.7 113.54,33.15 T2.E | C43.1 59.44,22.86 59.69,23.11 | C38.1 64.9,23.24 v63.25,23.37 | C44.2 69.98,23.24 69.85,23.37
  Top 0.305: U7.2 66.9,31.09 v66.8,30.73 | R14.1 71.37,34.54 v70.1,34.54 | C6.2 v73.91,38.1 | C30.2 v65.28,43.69 | U1.38 92.63,79.93 92.71,78.99 92.71,62.8 U1.1 | v121.92,57.96 121.79,58.09 U5.2 U5.3 | U5.12 129.16,59.31 v129.29,59.18
  Top 0.406: R14.1 C28.1 | v112.01,65.53 110.63,65.53 U1.15 | U3.M 130.3,75.18 v130.3,74.73 | v130.3,73.97 v131.06,73.97 130.79,73.97 130.79,74.18 131.06,74.18 v131.06,74.73 | U6.8 v83.06,10.67 | T8.E 40.13,8.06 v40.13,8.13 | T1.E 40.39,11.62 v40.39,11.68 | R54.1 | v37.85,22.35 R54.1 | R54.1 55.37,23.37 | 55.37,23.37 v63.25,23.37 69.85,23.37 v71.37,23.37 v75.95,23.37 | 56.22,14.72 U9.2@1 U9.2 55.63,23.11 55.37,23.37
  Top 2.54: R66.2 v16,2.54 v18.03,2.54 v20.07,2.54 v22.1,2.54 R67.2
  other vias: 131.06,76.45 131.06,75.69 129.34,73.96 128.57,73.96 129.34,74.73 128.57,74.73 128.57,75.69 129.34,75.69 130.3,76.45 129.34,76.45 128.57,76.45 137.67,81.28 136.91,81.28 142.75,94.54 144.02,94.54 32.26,42.42 33.53,42.42 34.8,42.42 36.07,42.42 37.34,42.42 38.61,42.42 38.61,41.15 37.34,41.15 36.07,41.15 34.8,41.15 33.53,41.15 32.26,41.15 32.26,39.88 33.53,39.88 34.8,39.88 36.07,39.88 37.34,39.88 38.61,39.88 38.61,38.61 37.34,38.61 36.07,38.61 34.8,38.61 33.53,38.61 22.1,76.45 22.1,77.72 22.1,78.99 23.37,78.99 24.64,78.99 24.64,77.72 23.37,77.72 23.37,76.45 24.64,76.45 25.91,76.45 25.91,77.72 25.91,78.99 22.1,80.26 23.37,80.26 24.64,80.26 25.91,80.26 52.83,69.85 52.83,71.88 52.83,73.91 38.61,69.6 38.61,75.44 41.15,73.91 41.15,71.88 38.61,71.63 41.15,75.95 27.18,76.71 34.8,76.71 41.15,69.85 23.37,83.06 23.37,86.87 23.37,84.84 73.66,42.67 74.68,32.26 72.64,40.89 29.72,38.61 29.72,42.42 6.86,71.88 1.78,65.79 6.86,74.17 6.86,77.98 3.05,77.98 3.05,81.79 6.86,81.79 6.86,79.76 3.05,79.76 25.91,58.93 28.19,58.93 26.67,64.26 26.67,66.55 28.7,64.26 28.7,66.55 28.7,68.83 26.67,68.83 30.73,49.78 30.73,52.07 30.73,58.17 30.73,60.2 30.73,62.23 31.75,68.83 115.32,88.39 122.68,79.76 121.92,79.76 142.75,89.41 142.75,90.68 149.35,69.85 157.73,60.71 156.46,60.71 107.19,41.4 106.17,41.4 100.33,38.1 101.6,38.1 102.87,38.1 103.89,39.88 118.36,4.57 116.84,5.33 117.6,5.33 118.36,5.33 118.36,6.1 117.6,6.1 116.84,6.1 24.13,51.56 24.13,49.53 64.01,87.12 65.02,87.12 68.83,87.38 72.39,87.88 76.2,74.17 76.71,63.75 69.34,74.42 97.03,51.82 92.46,48.26 67.06,45.21 117.6,4.57 116.84,4.57 1.78,61.72 1.78,57.4 1.78,52.83 3.05,57.66 3.05,53.09 7.11,57.66 7.11,53.09 7.11,49.28 3.05,49.28 139.57,73.15 139.57,72.26 137.67,80.52 136.91,80.52 140.59,73.15 140.59,72.26 32.26,37.34 33.53,37.34 34.8,37.34 36.07,37.34 37.34,37.34 38.61,37.34 52.83,78.74 50.04,81.03 52.83,75.95 41.15,77.98 41.15,80.01 43.18,80.77 30.73,54.1 30.73,56.13 30.73,64.26 30.73,66.55 24.13,47.5 24.89,43.43 26.67,42.67 28.7,42.67 52.83,46.48 52.83,44.45 52.83,42.42 52.83,40.39 52.83,38.35 52.07,36.58 50.04,35.81 52.83,35.05 58.67,35.05 60.71,35.05 56.39,39.88 63.25,43.43 51.82,81.79 53.85,81.79 56.9,75.44 60.96,73.91 65.53,73.91 61.98,80.01 58.67,88.65 60.71,88.65 56.64,88.65 61.98,87.12 61.98,85.09 61.98,82.8 19.81,88.9 19.81,86.87 19.81,84.84 19.81,82.8 14.73,91.44 12.45,91.44 10.41,91.44 112.78,3.81 111.51,3.81 114.05,3.81 110.24,3.81 108.71,3.81 107.19,3.81 105.66,3.81 104.14,3.81 102.62,3.81 115.32,3.81 116.84,3.81 117.6,3.81 118.36,3.81 145.29,4.32 146.69,4.32 143.89,4.32 142.49,4.32 148.08,4.32 142.49,6.35 148.08,6.35 139.7,4.32 141.1,4.32 149.48,4.32 101.35,3.81 101.35,5.33 101.35,6.86 101.35,8.38 101.35,9.91 101.35,11.43 142.75,91.95 144.02,91.95 144.02,90.68 144.02,89.41 142.75,93.22 144.02,93.22 63.5,66.55 63.5,64.52 63.5,62.48 63.5,60.45 63.5,58.42 63.5,56.39 63.5,54.36 63.5,52.32 63.5,50.29 54.86,46.48 56.9,46.48 58.93,46.48 60.96,46.74 62.48,48.26 62.23,68.58 60.71,70.1 58.67,70.1 56.64,70.1 54.86,70.1 30.99,86.61 28.96,86.61 28.96,84.58 28.96,82.55 30.99,82.55 33.02,82.55 33.02,84.58 33.02,86.61 43.69,82.8 43.94,84.84 44.96,86.61 46.74,87.38 48.77,87.63 50.8,87.63 52.83,87.63 54.86,87.63 56.64,87.63 54.86,80.26 55.12,78.23 35.05,86.61 35.05,84.58 35.05,82.55 30.99,34.29 32.26,34.29 29.72,34.29 29.72,32.77 29.72,31.5 30.99,30.73 32.26,30.99 32.51,32.51 28.45,33.02 46.99,27.69 49.02,27.69 51.05,27.69 53.09,27.69 55.12,27.69 57.15,27.69 59.18,27.69 61.21,27.69 63.25,27.69 65.28,27.69 73.91,30.48 71.88,30.48 69.85,30.48 64.52,29.97 60.2,29.97 55.37,29.97 51.56,29.97 48.77,29.97 46.74,29.97 44.7,29.97 42.67,29.97 40.64,29.97 38.61,29.97 36.58,29.97 34.54,29.97 32.51,29.97 44.45,31.75 43.94,33.53 43.94,35.31 41.66,37.08 41.4,38.86 41.4,40.89 41.4,42.93 40.64,32 38.61,32 38.61,34.04 40.64,34.04 36.58,34.04 36.58,32 34.54,32 34.54,34.04 67.31,27.69 71.37,27.69 73.41,27.69 75.44,27.69 77.47,27.69 79.25,20.32 77.98,23.37 79.5,23.37 79.5,26.92 79.5,28.96 77.47,28.96 79.5,30.99 79.5,32.51 79.5,34.54 79.5,36.58 76.71,32.26 76.71,34.29 76.71,36.32 73.66,44.96 61.21,43.43 63.25,45.47 61.21,45.47 60.71,37.08 60.71,39.12 60.71,41.15 58.42,39.88 58.42,37.85 51.56,35.05 54.1,35.05 76.71,48.01 79.5,38.61 79.5,48.01 76.71,50.04 79.5,50.04 79.5,52.07 79.5,54.1 76.71,52.07 76.71,54.1 76.71,56.13 76.71,58.17 76.71,60.2 76.71,62.23 79.5,58.67 79.5,60.71 79.5,62.74 83.31,54.61 85.34,54.61 87.38,54.61 89.41,54.61 83.31,58.67 85.34,58.67 87.38,58.67 89.41,58.67 91.44,58.67 83.31,52.58 85.34,52.58 87.38,52.58 66.8,87.38 10.41,95.5 12.45,95.5 14.48,95.5 16.51,95.5 18.54,95.5 20.57,95.5 22.61,95.5 24.64,95.5 26.67,95.5 28.7,95.5 30.73,95.5 32.77,95.5 34.8,95.5 36.83,95.5 38.86,95.5 40.89,95.5 42.93,95.5 44.96,95.5 46.99,95.5 49.02,95.5 51.05,95.5 53.09,95.5 55.12,95.5 57.15,95.5 59.18,95.5 61.21,95.5 63.25,95.5 65.28,95.5 67.31,95.5 69.34,95.5 71.37,95.5 75.44,95.5 79.25,91.44 79.25,89.41 79.25,87.38 79.25,85.34 79.25,83.31 79.25,81.28 79.25,79.25 79.25,77.22 79.25,75.18 8.38,95.5 8.38,4.32 10.92,4.32 12.95,4.32 14.99,4.32 17.02,4.32 23.11,4.32 25.15,4.32 27.18,4.32 29.21,4.32 31.24,4.32 136.4,49.07 136.4,48.06 92.58,7.62 92.58,6.48 83.31,20.07 83.31,18.03 10.92,6.35 12.95,6.35 14.99,6.35 17.02,6.35 21.08,6.35 23.11,6.35 25.15,6.35 27.18,6.35 54.1,15.75 54.1,14.73 55.63,14.73 57.15,14.73 55.63,15.75 57.15,15.75 54.1,13.72 55.63,13.72 57.15,13.72 60.96,15.75 62.74,15.75 64.52,15.75 66.29,15.75 67.56,15.75 68.83,16.13 52.58,15.75 51.56,14.99 55.63,19.81 56.64,21.59 58.67,21.59 61.47,23.37 67.31,23.37 73.66,23.37 74.42,21.08 76.2,19.81 76.45,17.78 54.61,21.59 52.83,21.08 50.8,21.08 49.02,20.07 47.5,18.54 45.47,18.54 45.47,20.57 46.48,23.37 49.02,23.37 76.45,15.75 77.72,15.75 79.25,14.48 79.25,17.02 73.91,8.64 71.88,8.64 69.85,8.64 138.43,81.28 138.43,80.52 139.19,81.28 139.19,80.52 139.95,81.28 139.95,80.52 51.56,23.37 54.1,23.37 56.64,23.37 43.94,23.37
  pour Top (isolate 0.406, rank 2, no thermals): 0.03,3.17 0.03,96.52 159.38,96.52 159.13,3.17
  pour Bottom (isolate 0.305): 0.03,97.03 159.64,97.03 159.13,3.43 0.03,3.43
IO0  (via drill 0.3)
  Top 0.254: U1.25 109.14,79.17 107.44,77.47 v107.44,65.53 | v148.84,50.55 T5.C
  Bottom 0.254: v107.44,65.53 107.95,65.53 118.62,55.12 148.84,55.12 v148.84,50.55
MOT_DIAG  (via drill 0.33)
  Top 0.203: U3.11 126.49,75.18 v126.24,74.93 | v127,63.75 127,64.13 U5.15
  Top 0.254: U5.15 126.99,63 127.51,62.99 131.06,62.99 R61.2
  Bottom 0.203: v127,63.75 127,67.31 125.98,68.33 125.98,74.68 v126.24,74.93
MOT_DIR  (via drill 0.3)
  Top 0.254: U1.26 107.95,80.37 107.95,82.04 115.57,82.04 v115.57,70.61 | v122.43,70.61 v128.27,70.61 | v130.05,70.61 130.29,70.87 U3.19
  Bottom 0.203: v128.27,70.61 v130.05,70.61
  Bottom 0.254: v115.57,70.61 v122.43,70.61
MOT_DRV_PWR
  Top 0.254: 124.97,72.39 128.29,72.39 U3.15 | 124.97,72.39 C5.1 | 124.97,72.39 120.35,72.39 L1.2
MOT_EN  (via drill 0.3)
  Top 0.203: 125.09,65.09 v125.09,64.01
  Top 0.254: v130.56,79.25 130.79,79.25 U3.2 | 125.09,65.09 U5.18 | v125.09,64.01 125.09,62.1 124.71,61.72 R41.1
  Bottom 0.203: v125.09,64.01 124.21,64.01 123.7,64.52 123.7,79.5 130.3,79.5 v130.56,79.25
MOT_STEP  (via drill 0.3)
  Top 0.254: U3.16 128.78,72.68 128.78,71.37 v121.92,71.37 | v114.55,77.09 U1.24
  Bottom 0.254: v121.92,71.37 114.55,71.37 v114.55,77.09
MS1  (via drill 0.33)
  Top 0.203: 127.29,76.2 126.24,76.2 | U5.16 126.34,66.45 v126.36,66.29
  Top 0.254: U3.9 127.29,76.2 | 126.24,76.2 v126.11,76.45
  Bottom 0.203: v126.11,76.45 126.11,75.82 125.48,75.18 125.48,67.82 126.36,66.93 v126.36,66.29
MS2  (via drill 0.33)
  Top 0.203: 127.29,75.69 125.22,75.69 v125.22,75.95 | U5.17 125.69,66.33 v125.22,66.93
  Top 0.254: U3.10 127.29,75.69
  Bottom 0.203: v125.22,66.93 124.97,67.31 124.97,75.69 v125.22,75.95
N$1
  Top 0.254: C10.2 96.52,30.99 101.85,30.99 102.36,31.5 102.36,34.04 103.12,34.8 105.16,34.8 105.92,35.56 U4.1
N$2
  Top 0.254: R35.1 L3V.A
N$3
  Top 0.61: 145.76,31.49 145.9,31.35 D5.C 146.51,30.75 | 143.76,25.33 R34.2
  Top 1.016: Q1.2 143.76,25.33 | R34.2 145.9,25.14 | J1.1 146.51,25.14 145.9,25.14 | 145.9,25.14 145.9,31.35
N$4
  Top 0.406: C24.2 63.12,32.51 63.12,34.8 63.18,34.9 | U7.1 63.18,32.51
  Top 0.61: 63.18,34.9 R47.2 | 63.18,32.51 C24.2
N$5  (via drill 0.3)
  Top 0.254: T11.C 138.09,58 139.19,56.9 v139.19,53.09 | v139.19,53.09 R56.1 v139.19,53.09 | TRX-COM.C 148.15,45.39 v147.57,45.97
  Bottom 0.254: v147.57,45.97 144.53,45.97 139.19,51.56 v139.19,53.09
N$6
  Top 0.254: U4.3 108.46,34.81 K2.1
N$7
  Top 0.254: 63.38,37.71 63.25,37.85
  Top 0.406: R47.1 63.25,37.85 C25.2 | U7.8 63.38,37.71
N$8
  Top 0.406: R43.1 C24.1
N$10
  Top 0.254: R6.2 139.17,68.27 T3.B
N$11
  Top 0.254: 67.92,40.13 68.17,40.39
  Top 0.305: C30.1 67.65,41.03 C31.1 | L5.2 C31.1 | 68.17,40.39 68.17,40.85 C31.1
  Top 0.406: U7.6 68.17,40.39 | U7.7 66.9,39.98 67.06,40.13 67.92,40.13
N$12
  Top 0.254: U5.6 124.39,49.35 131.83,41.91 ROTARY.3 131.83,38.86 130.05,36.83 130.05,34.23 R13.2
N$13
  Top 0.406: U7.4 69.47,32.13 71.16,32.13 arc90 71.16,32.13
  Top 0.61: 71.16,32.13 R12.2
N$14
  Top 0.254: T8.B 39.01,6.1 R55.2
N$15
  Top 0.305: U8.7 69.44,84.24 C32.1 70.57,84.84 C33.1 | C33.1 72.36,85.01 L4.2 | U8.6 70.71,84.98 C33.1
N$16
  Top 0.254: D2.C TPF1.TP
  Top 0.406: R15.1 C16.1 90.85,22.52 D4.A D2.C
N$17
  Top 0.254: C19.2 R23.2
N$18
  Top 0.254: T8.C 35.73,6.1 31.75,6.1 19.3,18.54 10.41,18.54 9.65,19.3 9.65,25.65 11.94,27.94 11.94,37.85 8.68,41.11 K3.2 7.75,45.52 D1.A
N$19
  Top 2.54: R66.1 20.07,25.4 | 20.07,25.4 R67.1 | K3.S 20.07,28.79 20.07,25.4
N$20
  Top 0.254: R48.1 C27.1 | U8.8 64.84,81.85
  Top 0.305: R48.1 64.64,81.65 64.84,81.85
N$21
  Top 0.254: D10.A 107.19,24.89 107.19,25.91 | 107.19,25.91 K2.9 | T2.C 114.94,29.08 112.01,26.16 107.44,26.16 107.19,25.91
N$22
  Top 0.254: R48.2 64.64,77.09 65.11,77.09 C26.2 65.02,76.63 65.02,76.2 65.53,75.69 68.07,75.69 68.07,76.65 U8.1
N$23
  Top 0.61: R45.2 61.99,76.62 C26.1
N$24
  Top 0.254: T2.B 115.89,34.6 R19.2
N$25
  Top 0.61: R36.2 72.17,76.45 U8.4
N$26
  Top 0.61: IC1.3 117.82,17.77 L10.2
N$27
  Top 0.254: U6.2 90.91,10.17 Q3.1
N$28
  Top 0.254: R1.1 132.58,53.33 R49.2 133.16,54.3 T11.B
N$29
  Top 0.254: U2.6 139.57,10.03 139.7,9.91 139.7,7.37 139.2,7.37 R22.2
N$30
  Top 0.254: T10.B 133.42,47.18 134.11,46.48 138.61,46.48 D6.C 138.68,45.21 138.94,44.96 R2.2
N$31
  Top 0.254: R26.2 152.74,48.26 T4.B
N$32
  Top 0.254: U6.3 92.71,10.67 92.96,10.92 Q3.3
N$33
  Top 0.254: L9.1 65.02,18.54 | 65.02,18.54 L8.2 | C38.2 64.9,18.67 65.02,18.54
  Top 0.406: L8.2 66.04,18.54
N$34
  Top 0.254: R27.2 145.46,52.58 T5.B
N$35
  Top 0.254: R31.2 139.12,64.71 T6.B
N$36
  Top 0.254: R16.1 C16.2 | C16.2 | C16.2 92.55,22.52
  Top 0.406: C16.2 94.55,22.61 T7.B
N$37
  Top 0.254: L9.2 59.94,18.54 | 59.94,18.54 57.43,18.54 U9.1 | C43.2 59.94,18.54
N$38
  Top 0.254: C35.1 140.67,52.11 R56.2 140.71,50.22 D7.A
N$39  (via drill 0.3)
  Top 0.254: D7.C 140.97,45.2 R2.1 141.22,47.25 v141.22,47.75 | v158.24,39.12 158.24,37 TRX-COM.F
  Bottom 0.254: v141.22,47.75 143.76,45.21 154.43,45.21 158.24,41.4 v158.24,39.12
N$40
  Top 0.254: DIAG.A R61.1
N$41
  Top 0.406: R39.1 R40.1
N$42
  Top 0.254: Q1.1 142.07,23.63 R34.1 R58.2
N$43
  Top 0.254: R57.1 137.15,32.77 R59.1 137.6,31.75 T9.B
N$44  (1 unrouted)
  Top 0.406: 48.72,13.66 C39.2 51.46,18.24 U9.3
N$45  (via drill 0.3)
  Top 0.254: D9.C D8.C 137.92,20.4 v138.18,20.45
  Bottom 0.254: v138.18,20.45 144.4,20.45 144.78,20.07 144.78,17.53 145.03,17.27 155.7,17.27 155.96,17.02 156.46,16.44 156.44,16.44 S1.2
N$46
  Top 0.254: D11.A 33.2,8.13 35.05,8.13 36.75,9.82 T1.C 36.83,10.75 36.83,15.49 K1.9
N$47
  Top 0.254: T1.B 39.01,9.65 R63.2
N$48
  Top 0.406: R17.1 73.15,18.54 73.41,18.29 73.41,16.51 73.14,16.51 C37.2
N$49
  Top 0.254: 92.53,27.09 C36.2 R64.1
  Top 0.406: C36.2 94.55,27.18 T12.B
N$50
  Top 0.254: L8.1 69.85,18.54 | 69.85,18.54 R17.2 | C44.1 69.72,18.67 69.85,18.54
N$51  (via drill 0.3)
  Top 0.254: R33.1 R18.2 145.53,67.3 v146.3,68.07
  Bottom 0.254: v146.3,68.07 146.3,73.15 147.07,73.91 149.28,73.91 X1.4
N$55
  Top 0.406: U2.7 140.46,11.3 | 140.46,11.3 144.4,11.3 145.29,12.19 C23.+ | R20.2 139.95,16.51 | 139.95,16.51 140.46,16 140.46,11.3 | Q1.3 139.87,16.59 139.95,16.51
  Top 0.813: R11.1 139.87,30.53 Q1.3
OA1
  Top 0.254: 140.48,75.2 140.46,74.68 132.3,74.68 U3.24
  Top 0.406: 140.74,75.34 140.48,75.2
  Top 0.61: 151.64,75.34 140.74,75.34
  Top 1.016: X1.8 151.64,75.34
  pour Top: 133.35,74.68 133.86,75.18 140.21,75.18 141.22,75.44 148.59,75.44 147.57,74.17 134.49,74.17 133.99,74.68
OA2
  Top 0.254: 131.29,72.14 131.95,72.14 133.6,70.61 141.99,70.61 143,71.63 143.76,72.77
  Top 0.305: U3.21 131.29,72.14 | 143.76,72.77 144.08,72.64
  Top 0.406: 144.08,72.59 144.08,72.64
  Top 0.61: 151.64,72.59 144.08,72.59
  Top 1.016: X1.9 151.64,72.59
  pour Top: 131.32,72.26 133.22,70.48 134.49,69.34 145.03,69.34 147.83,72.77 143.76,72.77 142.49,71.12 133.86,71.12 132.46,72.26
OB1
  Top 0.254: U3.26 139.18,75.68 139.19,77.47 143.24,77.47
  Top 0.406: 143.24,78.08 143.24,77.47
  Top 0.61: X1.7 143.24,78.08
  Top 1.016: X1.7 151.89,78.08
  pour Top: 148.34,78.23 138.43,78.23 136.91,76.71 135.38,76.71 133.6,75.69 139.7,75.69 140.72,76.71 147.32,76.71
OB2
  Top 0.254: U3.1 131.29,78.72 132.33,79.76 132.33,81.53 134.11,83.31 143.96,83.31
  Top 0.406: 143.96,80.82 143.96,83.31
  Top 0.61: 151.64,80.82 143.96,80.82
  Top 1.016: X1.6 151.64,80.82
  pour Top (isolate 0.254): 131.32,81.03 131.32,83.82 146.05,83.82 147.83,80.77 143.76,80.77 142.75,82.55 133.35,82.55 131.83,81.03
  pour Top: 132.33,81.28 132.33,79.5 131.32,78.23 131.32,81.28
OFF_DET
  Top 0.254: D8.A 133.6,30.99 131.83,30.99 R60.2 132.58,33.53 134.11,33.53 134.37,33.78 138.43,33.78 139.19,34.54 139.19,41.91 136.14,44.96 134.37,44.96 127.64,51.69 U5.11
ONOFF  (via drill 0.3)
  Top 0.254: T9.C D9.A 136.65,23.88 v138.18,23.88 | R58.1 v141.22,21.59
  Bottom 0.254: v141.22,21.59 138.18,21.59 v138.18,23.88
PA3V
  Top 0.406: L18.1 C42.1 C40.1 48.77,9.4 R62.2 46.98,11.48 C45.1
PCA_INT  (via drill 0.3)
  Top 0.254: U5.1 119.63,59.31 | 119.63,59.31 119.25,59.31 118.87,59.69 118.87,60.44 R37.2 | v103.63,60.45 103.63,51.05 119.63,51.05 119.63,59.31 | U1.6 98.98,63.93 v99.82,64.77
  Bottom 0.254: v99.82,64.77 103.12,64.77 103.63,64.26 v103.63,60.45
PD/UART
  Top 0.254: U3.14 127.27,73.66 119.63,73.66 R9.2 R10.2
PWR_FWD
  Top 0.61: R52.2 arc90 R52.2 | 58.67,84.32 R46.2
  Top 1.27: R46.2 58.67,80.16 R45.1 | R52.2 58.67,84.32 | R52.2 49.02,84.33 arc90 46.99,82.3 FWD.TP
PWR_ON
  Top 0.254: U5.10 126.99,51.32 133.86,44.45 135.89,44.45 138.68,41.66 138.68,35.05 138.18,34.54 133.61,34.54 R57.2
PWR_REV
  Top 0.254: 55.85,32.35 56.54,33.04 | 53.89,32.26 R51.2 55.85,32.35 | 55.85,32.35 56.02,32.35 | 56.02,32.35 R43.2 | 56.02,32.35 56.02,34.73 R44.1
  Top 0.406: 56.24,35.15 R44.1 | 55.85,32.35 arc-90 55.76,32.26
  Top 0.61: 55.98,35.05 R44.1
  Top 1.27: 55.76,32.26 49.02,32.26 arc-90 46.99,34.29 46.99,44.2
  Top 2.184: 46.99,44.2 46.48,44.7 46.23,44.7 44.7,46.23 27.69,46.23 27.69,55.12
RELAY1  (via drill 0.3)
  Top 0.254: U5.9 126.34,50.95 v130.56,46.74 | R19.1 117.59,35.81 v117.86,36.07
  Bottom 0.254: 118.62,37.08 118.62,36.83 v117.86,36.07
  Bottom 0.305: v130.56,46.74 130.05,47.5 124.71,47.5 124.21,46.99 124.21,43.43 123.7,42.93 118.62,42.93 118.62,37.08
REV0
  Top 0.406: R12.1 R14.2 C28.2 R8.2
RTS
  Top 0.254: SL1.4 152.74,51.31 T4.E 152.74,52.58 R27.1
RXD0  (via drill 0.3)
  Top 0.254: U1.34 97.71,77.8 98.3,77.22 104.39,77.22 105.41,76.2 105.41,67.31 v105.16,67.06
  Bottom 0.254: v105.16,67.06 105.41,67.31 106.93,67.31 118.87,55.63 154.94,55.63 155.45,55.12 155.45,54.1 155.7,53.85 SL1.3
SCL  (via drill 0.3)
  Top 0.254: v95.25,78.74 95.25,80.29 U1.36 | R28.2 118.62,63.25 v119.76,63.25 121.92,63.25 122.43,64.01 122.43,65.14 U5.22 122.43,65.16 | U6.4 87.63,11.18 87.38,11.43 87.38,14.73 v88.9,14.73
  Bottom 0.254: v88.9,14.73 89.92,14.73 89.92,43.43 98.04,51.56 98.04,59.18 98.55,59.69 98.55,64.01 95.5,67.06 95.5,78.49 v95.25,78.74 102.87,78.74 114.81,66.8 119.38,66.8 120.65,65.53 120.65,63.25 v119.76,63.25
SD_CS
  Top 0.254: U1.23 113.41,75.82 113.54,75.69 113.54,56.13 113.28,55.88 113.28,55.79 CON-SD.1
SD_MISO
  Top 0.254: U1.14 109.14,57.58 108.2,56.64 108.2,55.79 CON-SD.3
SD_MOSI
  Top 0.254: CON-SD.2 110.85,56.24 113.03,58.42 113.03,66.04 112.27,66.8 110.76,66.8 U1.16
SD_SCK
  Top 0.254: U1.13 107.87,58.34 105.92,56.39 CON-SD.4
SDA  (via drill 0.3)  (1 unrouted)
  Top 0.254: v98.81,77.98 98.81,80.2 U1.33 | 119.58,64.31 v119.76,64.26 | v119.76,64.26 120.14,64.01 121.67,64.01 121.79,64.13 U5.23 | R29.2 119.71,64.31 v119.76,64.26 | 88.88,11.67 88.87,11.68 88.14,11.68 87.88,11.94 87.88,13.72 v88.9,13.72
  Bottom 0.254: v88.9,13.72 90.42,13.72 90.42,43.18 98.55,51.31 98.55,58.93 99.06,59.44 99.06,64.26 96.01,67.31 96.01,77.72 96.27,77.98 v98.81,77.98 102.87,77.98 114.55,66.29 119.13,66.29 119.89,65.53 119.89,64.39 v119.76,64.26 119.71,64.31
SPREAD  (via drill 0.33)
  Top 0.203: U5.19 124.39,66.1 v124.46,66.17
  Top 0.254: U3.7 128.29,77.95 127.51,78.74 v127,78.74
  Bottom 0.203: v127,78.74 124.46,78.74 v124.46,66.17
T_CS  (via drill 0.3)  (1 unrouted)
  Top 0.254: 104.14,62.45 U1.10 | 104.14,63.25 104.14,65.53 103.12,66.55 96.52,66.55 v94.49,68.58
  Bottom 0.254: v94.49,68.58 94.23,68.83 94.23,87.52 92.72,89.28 92.58,89.53 TFT-CON.11
TFT_CS
  Top 0.254: 103.89,80.52 104.06,80.52 U1.29
  Top 0.305: 103.89,80.52 103.89,87.12 104.14,87.38 112.52,87.38 112.78,87.63 112.78,90.75 TFT-CON.3
TFT_DC  (via drill 0.3)
  Top 0.254: v106.17,77.98 105.92,77.72 105.92,64.01 105.33,63.42 U1.11
  Bottom 0.254: v106.17,77.98 106.68,77.98 108.2,79.5 108.2,88.65 107.44,89.41 107.44,90.78 TFT-CON.5
TFT_MISO
  Top 0.254: TFT-CON.13 87.6,92.93 88.14,93.47 93.22,93.47 93.85,92.84 93.85,86.49 94.23,86.11 101.09,86.11 101.6,85.6 101.6,80.45 U1.31
TFT_MOSI
  Top 0.254: 93.98,80.37 U1.37 93.73,80.55 93.73,85.6 93.22,86.11 93.22,87.88 92.89,88.21 90.1,88.21 TFT-CON.12
  Bottom 0.254: TFT-CON.12 90.1,92.89 90.42,93.22 104.39,93.22 105.16,92.46 105.16,90.99 TFT-CON.6
TFT_RES  (via drill 0.3)
  Top 0.254: U1.12 106.6,77.14 v106.68,77.22
  Bottom 0.254: v106.68,77.22 108.71,79.25 108.71,88.65 110.24,90.17 110.24,90.79 TFT-CON.4
TFT_SCLK
  Top 0.254: U1.30 102.79,90.74 TFT-CON.7
  Bottom 0.254: TFT-CON.10 95.1,88.29 95.5,87.88 102.11,87.88 102.62,88.39 102.62,90.91 TFT-CON.7
TRX  (1 unrouted)
  Top 0.254: C17.1 R53.2
  Top 0.61: K1.6 K1.5 33.02,22.86 24.64,31.24 24.64,38.86 22.61,40.89 20.15,40.89 K3.O
  Top 2.54: K3.O 19.9,41.15 15.75,41.15 14.31,42.33 TRX.TP
TRX_IN
  Top 1.27: X2.1 4.57,12.07 4.57,17.53 3.05,19.05 3.05,33.53 4.66,35.14 K3.P
  pour Top: 3.94,12.95 5.08,12.95 5.08,27.3 4.57,28.19 4.57,30.73 7.37,33.53 7.37,36.07 3.81,36.07 1.78,33.78 1.78,17.78 3.56,16.51 3.94,16.26
TXD0  (via drill 0.3)
  Top 0.254: U1.35 96.44,78.06 97.79,76.71 104.14,76.71 104.9,75.95 104.9,67.82 v104.39,67.82
  Bottom 0.254: v104.39,67.82 107.19,67.82 119.13,56.13 156.97,56.13 SL1.2
U2RXD  (via drill 0.3)
  Top 0.254: U1.27 106.68,80.37 106.68,82.8 v114.3,82.8 | v118.11,74.42 v118.12,74.42 R9.1
  Bottom 0.254: v114.3,82.8 117.35,82.8 117.35,74.42 v118.11,74.42
U2TXD  (via drill 0.3)
  Top 0.254: U1.28 105.41,80.37 105.41,83.57 v115.57,83.57 | v118.11,77.98 v118.12,77.98 R10.1
  Bottom 0.254: v115.57,83.57 118.11,83.57 v118.11,77.98
UART1_RX  (via drill 0.3)
  Top 0.254: U1.8 101.6,62.29 101.6,60.96 102.11,60.45 102.11,49.78 102.36,49.53 v120.4,49.53 121.54,49.53 121.67,49.4 RX.TP | R50.2 T10.C 132.42,50.88 v131.06,49.53
  Bottom 0.254: v120.4,49.53 v131.06,49.53
UART1_TX  (via drill 0.3)
  Top 0.254: U1.9 102.79,50.37 102.87,50.29 v121.41,50.29 TX.TP | v129.54,51.05 v129.55,51.05 R1.2
  Bottom 0.254: v121.41,50.29 128.78,50.29 v129.54,51.05
VCP
  Top 0.254: C18.1 127,80.52 128.78,78.74 128.78,77.7 U3.6
VFO_IN
  Top 0.406: C39.1 K1.10 45.21,15.49 L7.2
VFO_SEL  (via drill 0.3)
  Top 0.254: R55.1 R63.1 v42.93,10.67 | v98.04,6.6 98.04,15.75 108.2,15.75 108.2,21.34 119.89,33.02 v119.89,44.45 | v126.49,48.77 125.04,50.22 U5.7
  Bottom 0.254: v42.93,10.67 42.93,5.33 72.9,5.33 76.96,9.4 82.55,9.4 86.61,5.33 97.79,5.33 98.04,5.59 v98.04,6.6 | v119.89,44.45 119.89,47.75 120.9,48.77 v126.49,48.77
VREF
  Top 0.203: VREF.TP 128.78,68.42 R39.2
  Top 0.254: U3.17 129.29,68.36 R39.2
(copper drawn outside any net)
  shapes: Top area x5

## Text on the board
tPlace: B2 | B1 | A1 | A2
tNames: ANT | GND | TXD | RXD | RTS | DTR | SD_CS | SCK | MISO | MOSI | TxD | RxD | SN: | MLAT V1.90 / 2023-03-14
Document: 160*100